# EAGLE board UVA-LED-board (EAGLE 6.4)
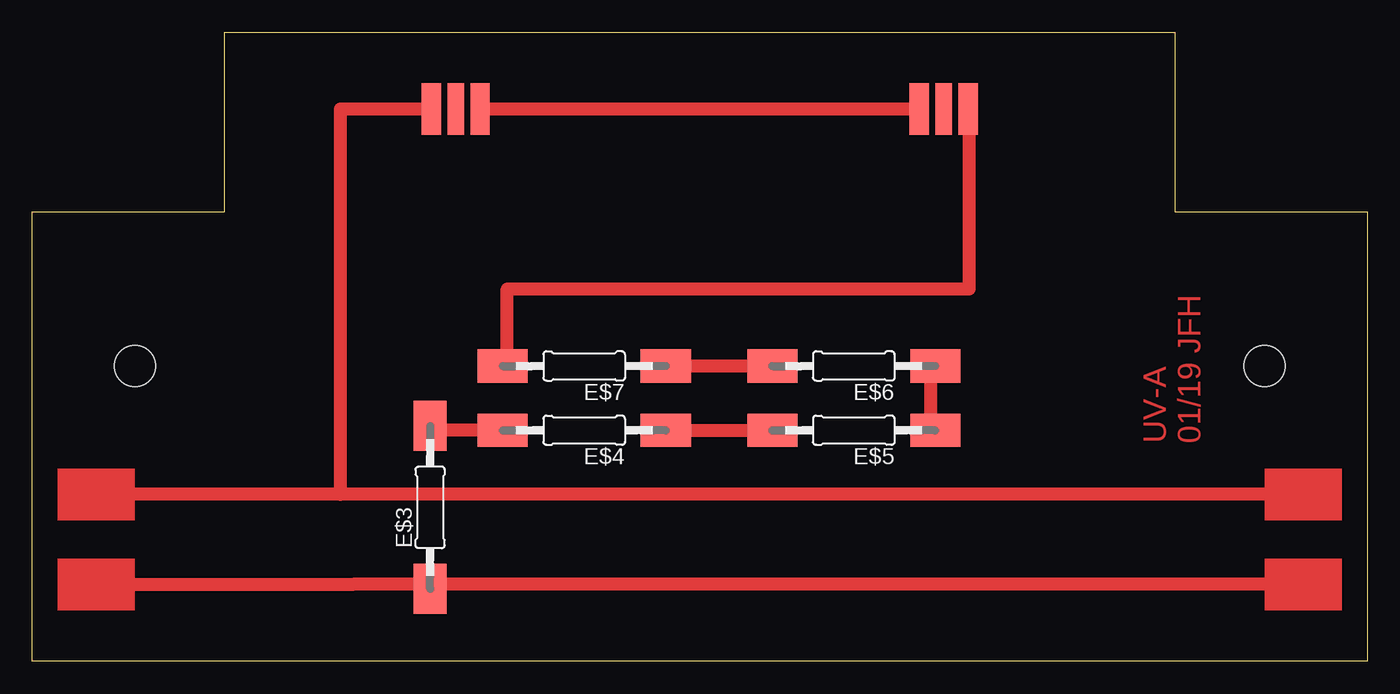
[diagram p0: board, top side]
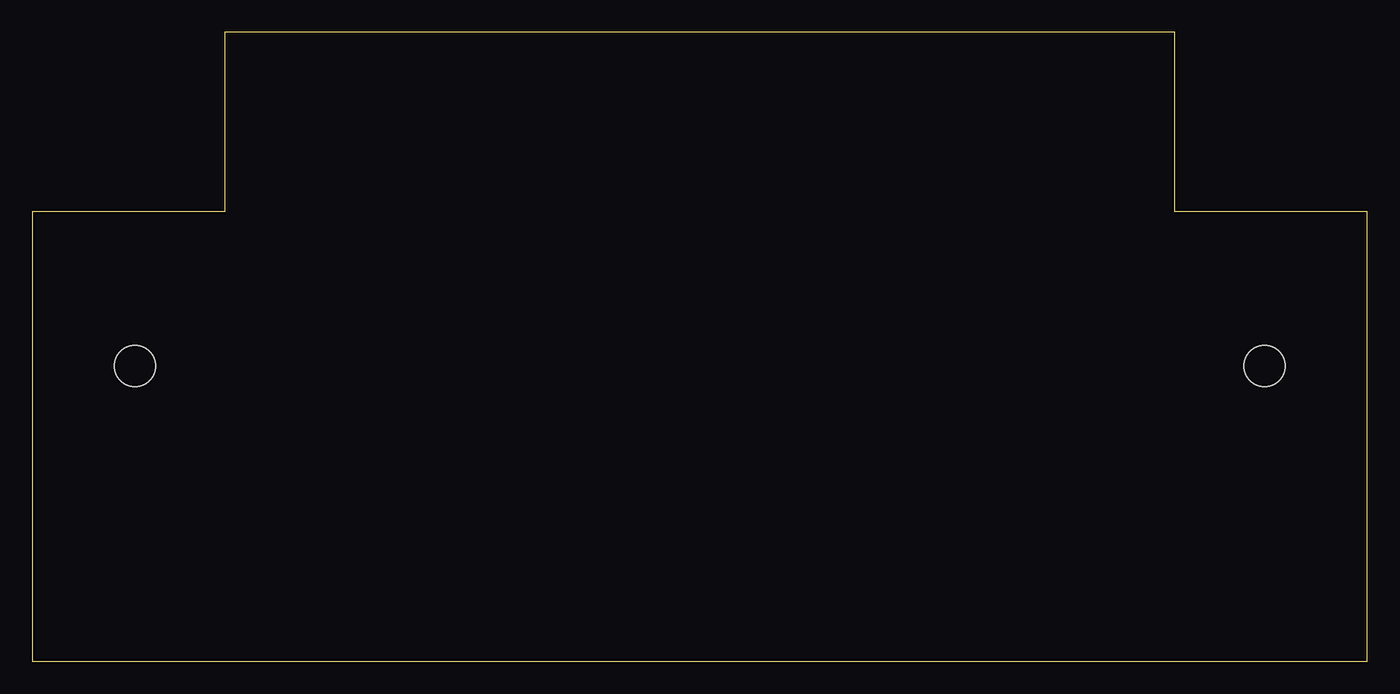
[diagram p1: board, bottom side, seen from below]

Size 104 x 49 mm. Coordinates in mm from the lower left corner, seen from the top.
Outline: 0,0 0,35 15,35 15,49 89,49 89,35 104,35 104,0 0,0
Copper layers (1*16): Top 0.035mm / dielectric 1.5mm / Bottom 0.035mm
Design rules "default": minimum track width 10mil, minimum drill 24mil, track to track 8mil, track to pad 8mil, pad to pad 8mil, via to via 8mil, smd to smd 8mil, copper to edge 40mil, drill to drill 8mil, minimum pad ring 10mil, minimum via ring 8mil, stop-mask expansion 4mil, vias tented up to drill 0mil, thermal gap 10mil
Holes 3.2 mm at 96,23 8,23

## Footprints (pad centres in the part's own frame; a part is rotated, then mirrored left to right if it is on the bottom)
FLAT2 = smd 1.3 x 4: P$1 0,0 | smd 1.5 x 4: P$2 1.9,0; P$3 -1.9,0
0207/12-SMD = smd 3.9 x 2.6: P$1 -6.35,0; P$2 6.35,0

## Placement (x,y rotation side)
E$1  [FLAT2]  33,43 0 top
E$2  [FLAT2]  71,43 0 top
E$3  1R5  [0207/12-SMD]  31,12 90 top
E$4  1R5  [0207/12-SMD]  43,18 180 top
E$5  1R5  [0207/12-SMD]  64,18 180 top
E$6  0  [0207/12-SMD]  64,23 180 top
E$7  0  [0207/12-SMD]  43,23 180 top

## Library data of the parts
E$1 E$2 = led
E$3-E$7 = rcl

## Tracks (layer width: path | path; a pad name or v marks a point on that pad's centre or on a via)
S$1
  Top 1.016: 36,18 31,18
S$2
  Top 1.016: 24,13 5,13 | 99,13 24,13 | 31,43 24,43 24,13
S$3
  Top 1.016: 49,18 57,18
S$4
  Top 1.016: 57,23 49,23
S$5
  Top 1.016: 70,18 70,23
S$6
  Top 1.016: 37,23 37,29 73,29 73,44
S$7  (via drill 0.6)
  other vias: 8,23
S$8  (via drill 0.6)
  other vias: 96,23
S$9
  Top 1.016: 69,43 35,43
S$20
  Top 1.016: 6,6 25,6
S$21
  Top 1.016: 98,6 25,6
(copper drawn outside any net)
  shapes: Top area x4

## Text on the board
Top: UV-A / 01/19 JFH